# Allegro board Board_V_1_0_85x75.brd
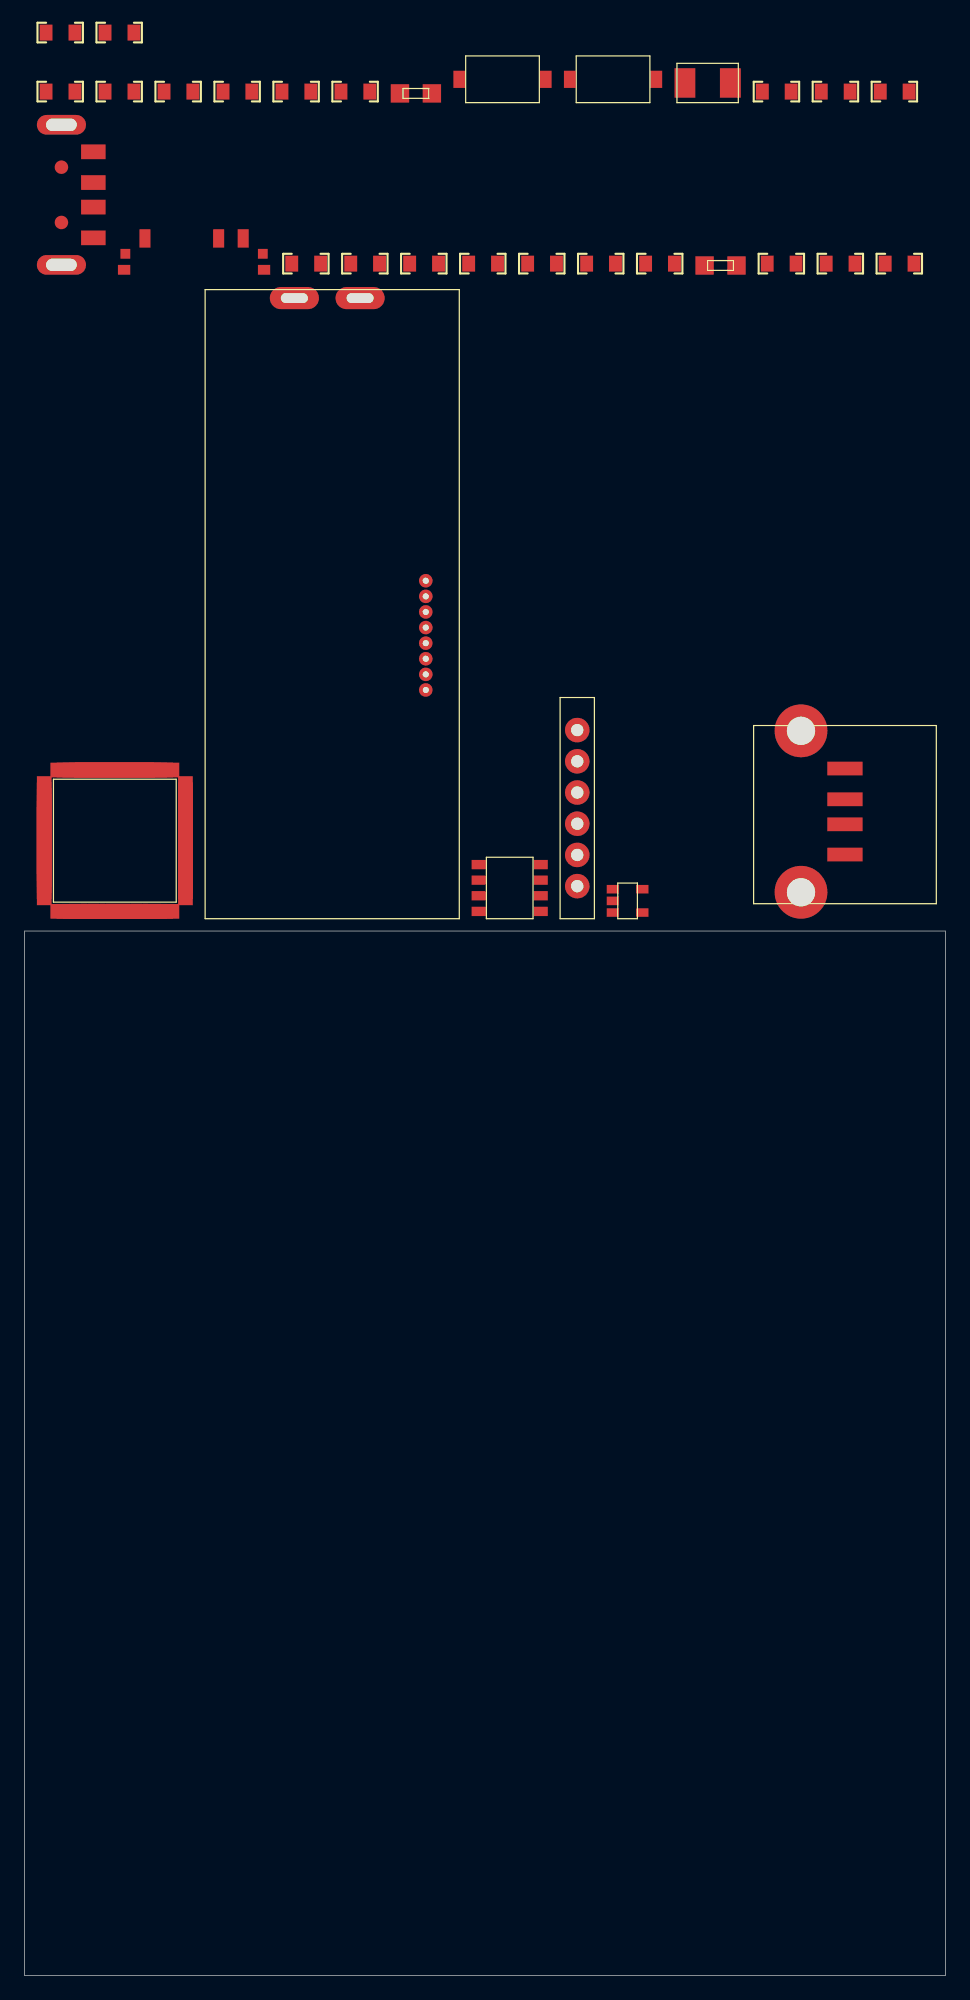
[diagram p0: board, top side]
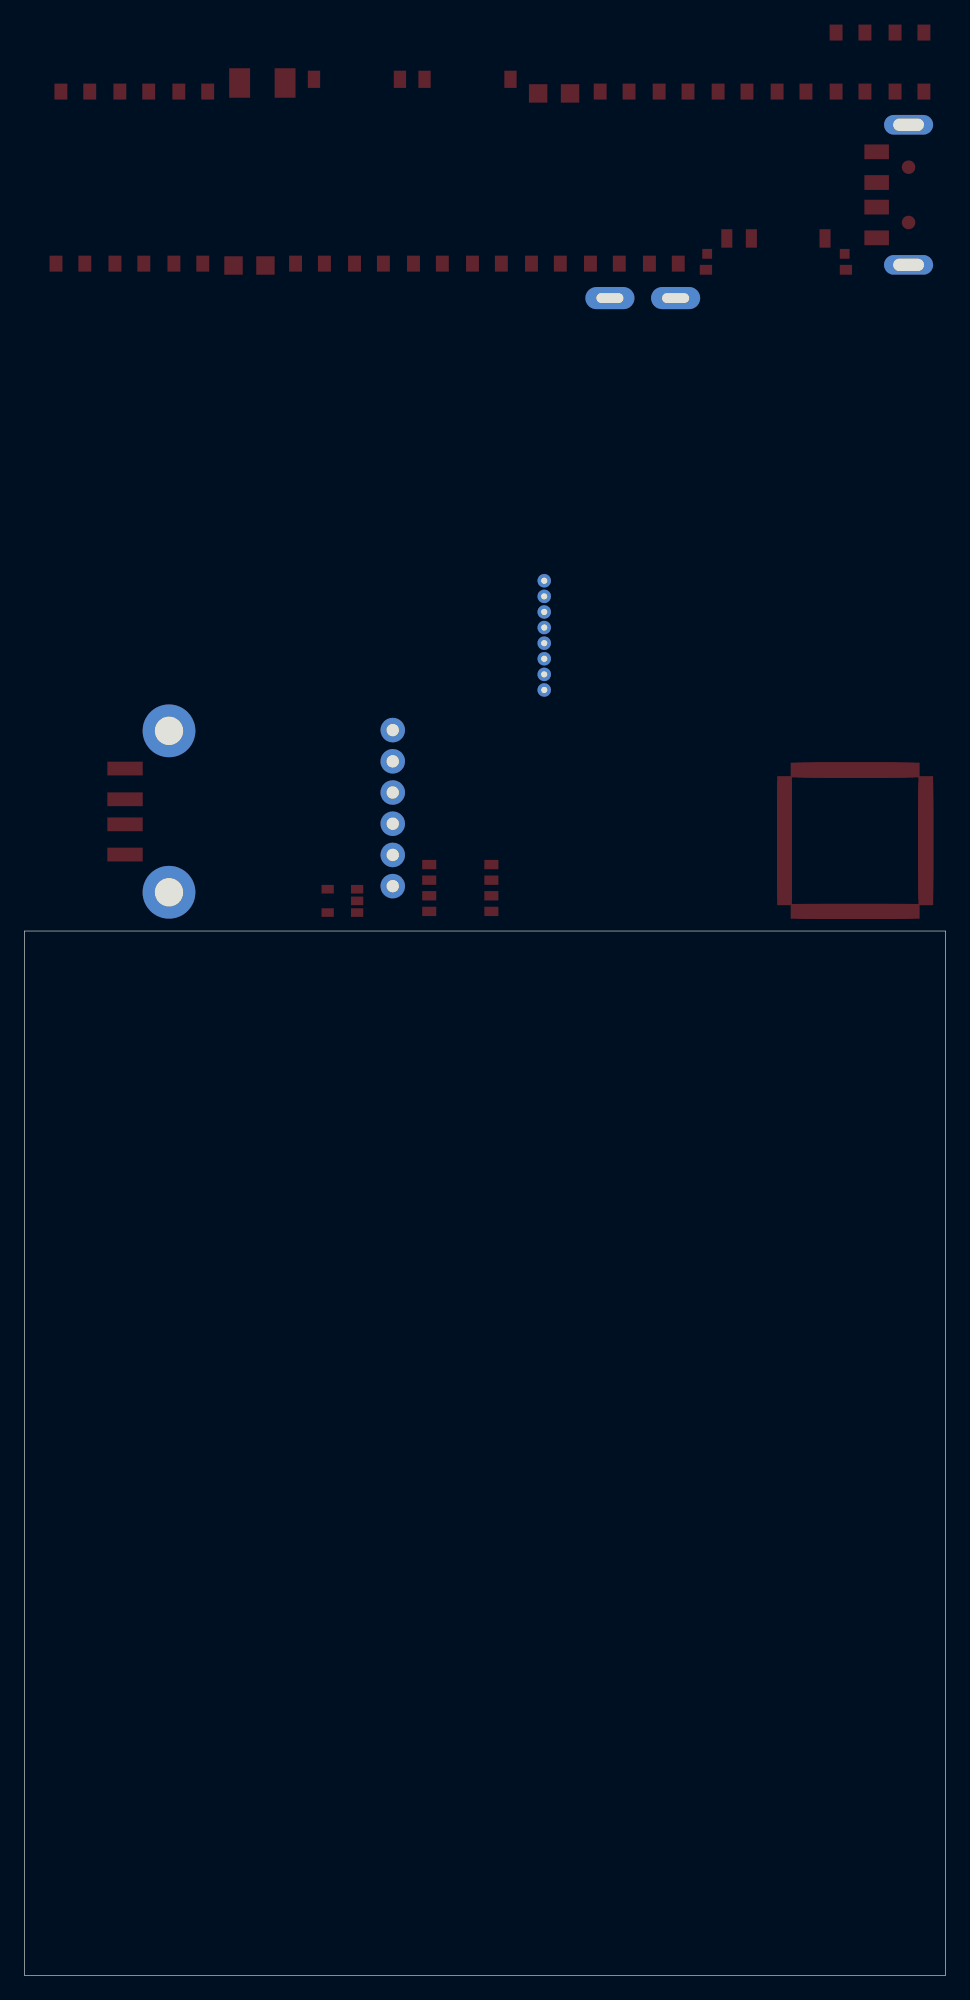
[diagram p1: board, bottom side, seen from below]

Outline 75 x 85 mm; copper layers: TOP, BOTTOM. Coordinates in mm from the lower left corner of the outline.
Outline path: 0,85 0,0 75,0 75,85 0,85

## Placement (name value [footprint] x y rotation side)
C1  C_0805  [0805]  6.56 158.12 0 top
C2  C_0805  [0805]  26.56 139.32 0 top
C3  C_0805  [0805]  21.76 139.32 0 top
C4  C_0805  [0805]  36.17 139.32 0 top
C5  C_0805  [0805]  31.37 139.32 0 top
C6  C_0805  [0805]  50.58 139.32 0 top
C7  C_0805  [0805]  60.49 139.32 0 top
C8  C_0805  [0805]  45.78 139.32 0 top
C9  C_0805  [0805]  1.75 153.32 0 top
C10  C_0805  [0805]  69.69 153.32 0 top
C11  C_0805  [0805]  64.89 153.32 0 top
C12  C_0805  [0805]  65.29 139.32 0 top
C13  C_0805  [0805]  60.09 153.32 0 top
C14  C_0805  [0805]  40.97 139.32 0 top
C15  C_0805  [0805]  70.09 139.32 0 top
D1  LED  [KINGBRIGHT_KPJA2107]  56.68 139.17 0 top
D2  LED  [KINGBRIGHT_KPJA2107]  31.87 153.17 0 top
J1  CON6  [PINHEAD_6]  45.01 101.35 0 top
NOREF  -  [unnamed]  70 5 0 top
NOREF#2  -  [unnamed]  5 80 0 top
NOREF#3  -  [unnamed]  5 5 0 top
NOREF#4  -  [unnamed]  70 80 0 top
P1  USB_A_FEMALE  [USBFEMALETYPA]  66.82 98.22 0 top
R1  R_0805  [0805]  1.75 158.12 0 top
R2  R_0805  [0805]  6.56 153.32 0 top
R3  R_0805  [0805]  11.36 153.32 0 top
R4  R_0805  [0805]  16.16 153.32 0 top
R5  R_0805  [0805]  20.97 153.32 0 top
R6  R_0805  [0805]  25.77 153.32 0 top
SW1  Schalter  [PRGSWITCH]  13.81 138.82 0 top
SW2  Taster  [PUSH_BUTTON_KSR221]  38.93 154.32 0 top
SW3  Taster  [PUSH_BUTTON_KSR221]  47.93 154.32 0 top
U1  XTAL  [CRYSTAL]  55.63 154.02 0 top
U2  USB_A_MALE  [USBMALETYPA]  5.6 148.42 0 top
U3  <VALUE>  [STM32F205]  1.6 96.1 0 top
U4  MIDAS_LCD  [DISPLAY]  32.68 109.06 0 top
U5  MIC5265  [SOT23-5]  47.91 88.4 0 top
U6  S25FL208K  [SOIC8_N]  36.98 90.41 0 top

## Library data of the parts
C1-C15 = C_0805
D1 D2 = LED
J1 = CON6
P1 = USB_A_FEMALE
R1-R6 = R_0805
SW1 = Schalter
SW2 SW3 = Taster
U1 = XTAL
U2 = USB_A_MALE
U3 = STM32F205
U4 = MIDAS_LCD_0
U5 = MIC5265
U6 = S25FL208K

## Footprints (pads in the part's own frame, mm; a bottom-side part is the same pattern mirrored in y, then rotated)
0805
  rect 1.05x1.3 smd: 1(0,0) 2(2.35,0)
CRYSTAL
  rect 1.7x2.4 smd: 1(-1.85,0) 2(1.85,0)
DISPLAY
  round 1.1 hole 0.5: 1(0,4.445) 2(0,3.175) 3(0,1.905) 4(0,0.635) 5(0,-0.635) 6(0,-1.905) 7(0,-3.175) 8(0,-4.445)
  oval 4x1.8 hole 2.2x0.8: A(-5.35,27.45) K(-10.7,27.45)
KINGBRIGHT_KPJA2107
  rect 1.5x1.5 smd: 1(-1.3,0) 2(1.3,0)
PINHEAD_6
  round 2 hole 1 unplated: (0,0) (0,-2.54) (0,-5.08) (0,-7.62) (0,-10.16) (0,-12.7)
PRGSWITCH
  rect 1x0.8 smd: (-5.7,0) (5.7,0)
  rect 0.8x0.8 smd: (-5.6,1.3) (5.6,1.3)
  rect 0.9x1.5 smd: 1(-4,2.55) 2(2,2.55) 3(4,2.55)
PUSH_BUTTON_KSR221
  rect 1x1.4 smd: 1(-3.5,0) 2(3.5,0)
SOIC8_N
  rect 1.143x0.76 smd: 1(0,0) 2(0,-1.27) 3(0,-2.54) 4(0,-3.81) 5(5.06,-3.81) 6(5.06,-2.54) 7(5.06,-1.27) 8(5.06,0)
SOT23-5
  rect 1x0.7 smd: 1(0,0) 2(0,-0.95) 3(0,-1.9) 4(2.4,-1.9) 5(2.4,0)
STM32F205
  rect 1.2x3 smd: 1(0,0) 2(0,-0.5) 3(0,-1) 4(0,-1.5) 5(0,-2) 6(0,-2.5) 7(0,-3) 8(0,-3.5) 9(0,-4) 10(0,-4.5) 11(0,-5) 12(0,-5.5) 13(0,-6) 14(0,-6.5) 15(0,-7) 16(0,-7.5) 33(11.5,-7.5) 34(11.5,-7) 35(11.5,-6.5) 36(11.5,-6) 37(11.5,-5.5) 38(11.5,-5) 39(11.5,-4.5) 40(11.5,-4) 41(11.5,-3.5) 42(11.5,-3) 43(11.5,-2.5) 44(11.5,-2) 45(11.5,-1.5) 46(11.5,-1) 47(11.5,-0.5) 48(11.5,0)
  rect 3x1.2 smd: 17(2,-9.5) 18(2.5,-9.5) 19(3,-9.5) 20(3.5,-9.5) 21(4,-9.5) 22(4.5,-9.5) 23(5,-9.5) 24(5.5,-9.5) 25(6,-9.5) 26(6.5,-9.5) 27(7,-9.5) 28(7.5,-9.5) 29(8,-9.5) 30(8.5,-9.5) 31(9,-9.5) 32(9.5,-9.5) 49(9.5,2) 50(9,2) 51(8.5,2) 52(8,2) 53(7.5,2) 54(7,2) 55(6.5,2) 56(6,2) 57(5.5,2) 58(5,2) 59(4.5,2) 60(4,2) 61(3.5,2) 62(3,2) 63(2.5,2) 64(2,2)
unnamed
  round 0 hole 3.175 unplated: (0,0)
USBFEMALETYPA
  round 4.3 hole 2.3: (-3.58,3.07) (-3.58,-10.07)
  rect 2.88x1.12 smd: 1(0,0) 2(0,-2.5) 3(0,-4.54) 4(0,-7)
USBMALETYPA
  oval 4x1.6 hole 2.5x1: (-2.6,2.2) (-2.6,-9.2)
  round 1.1 smd: (-2.6,-1.25) (-2.6,-5.75)
  rect 2x1.2 smd: 1(0,-7) 2(0,-4.5) 3(0,-2.5) 4(0,0)

## Nets
3V3: C3.1 C5.1 C6.2 C7.1 C8.1 C11.1 C13.2 C14.2 C15.1 R1.2 R2.2 R3.1 R4.1 R5.1 SW1.1 U3.13(VDDA) U3.19(VDD#19) U3.32(VDD#32) U3.48(VDD#48) U3.64(VDD#64) U4.4(VDD) U5.5(OUT) U6.3(WP#) U6.7(HOLD#) U6.8(VCC)
GND: C1.2 C2.2 C3.2 C4.2 C5.2 C6.1 C7.2 C8.2 C9.2 C10.2 C11.2 C14.1 C15.2 SW1.3 SW2.1 SW3.1 U3.12(VSSA) U3.18(VSS#18) U3.63(VSS#63) U4.5(VSS) U4.8(RST) U4.K U6.4(GND)
GND_SIGNAL: P1.4(-) U2.4(-) U5.2(GND)
VBAT: U3.1(VBAT)
NRST: U3.7(NRST)
VUSB: P1.1(+) U2.1(+) U5.1(VIN) U5.3(EN)
N05358: C4.1 U3.47(VCAP_2)
N05450: C10.1 U3.31(VCAP_1)
N05685: SW1.2 U3.60(BOOT0)
N05689: U2.2(D-) U3.45(PA12)
N05714: U2.3(D+) U3.44(PA11)
N05739: P1.2(D-) U3.35(PB14)
N05751: P1.3(D+) U3.36(PB15)
N06248: U3.22(PA6) U6.2(SO)
N06281: U3.20(PA4) U6.1(CS#)
N07604: U3.21(PA5) U6.6(SCK)
N07637: U3.23(PA7) U6.5(SI)
N08036: R4.2 SW3.2 U3.9(PC1)
N08040: R3.2 SW2.2 U3.8(PC0)
N08183: C12.2 U4.3(CAP1P)
N08220: C13.1 U4.1(VOUT)
N08493: C12.1 U4.2(CAP1N)
N08729: C1.1 U1.1 U3.6(PH1)
N08747: C2.1 U1.2 U3.5(PH0)
N09420: D2.1(CATHODE) U3.50(PA15)
N09427: D1.1(CATHODE) U3.51(PC10)
N09557: D1.2(ANODE) R1.1
N09564: D2.2(ANODE) R2.1
N10949: R5.2
N11044: U3.49(PA14)
N11071: U3.46(PA13)
N12892: R6.2 U4.A
N12896: R6.1 U3.16(PA2)
N041153: C9.1 U5.4(BYP)

Pads without a net: U3 2 3 4 10 11 14 15 17 24 25 26 27 28 29 30 33 34 37 38 39 40 41 42 43 52 53 54 55 56 57 58 59 61 62; U4 6 7
